# Altium PCB rpi_adapter.PcbDoc (part 3 of 3)
Units mil, origin at the board's own origin, x right, y up, seen from the top; angles counter-clockwise.
Board outline 1339.12 x 1250 mil, 4 copper layers (Top Layer, L02_GND, L03_GND, Bottom Layer), stack 36.268 mil thick; 18 components, 28 nets, 121 pads, 201 vias.
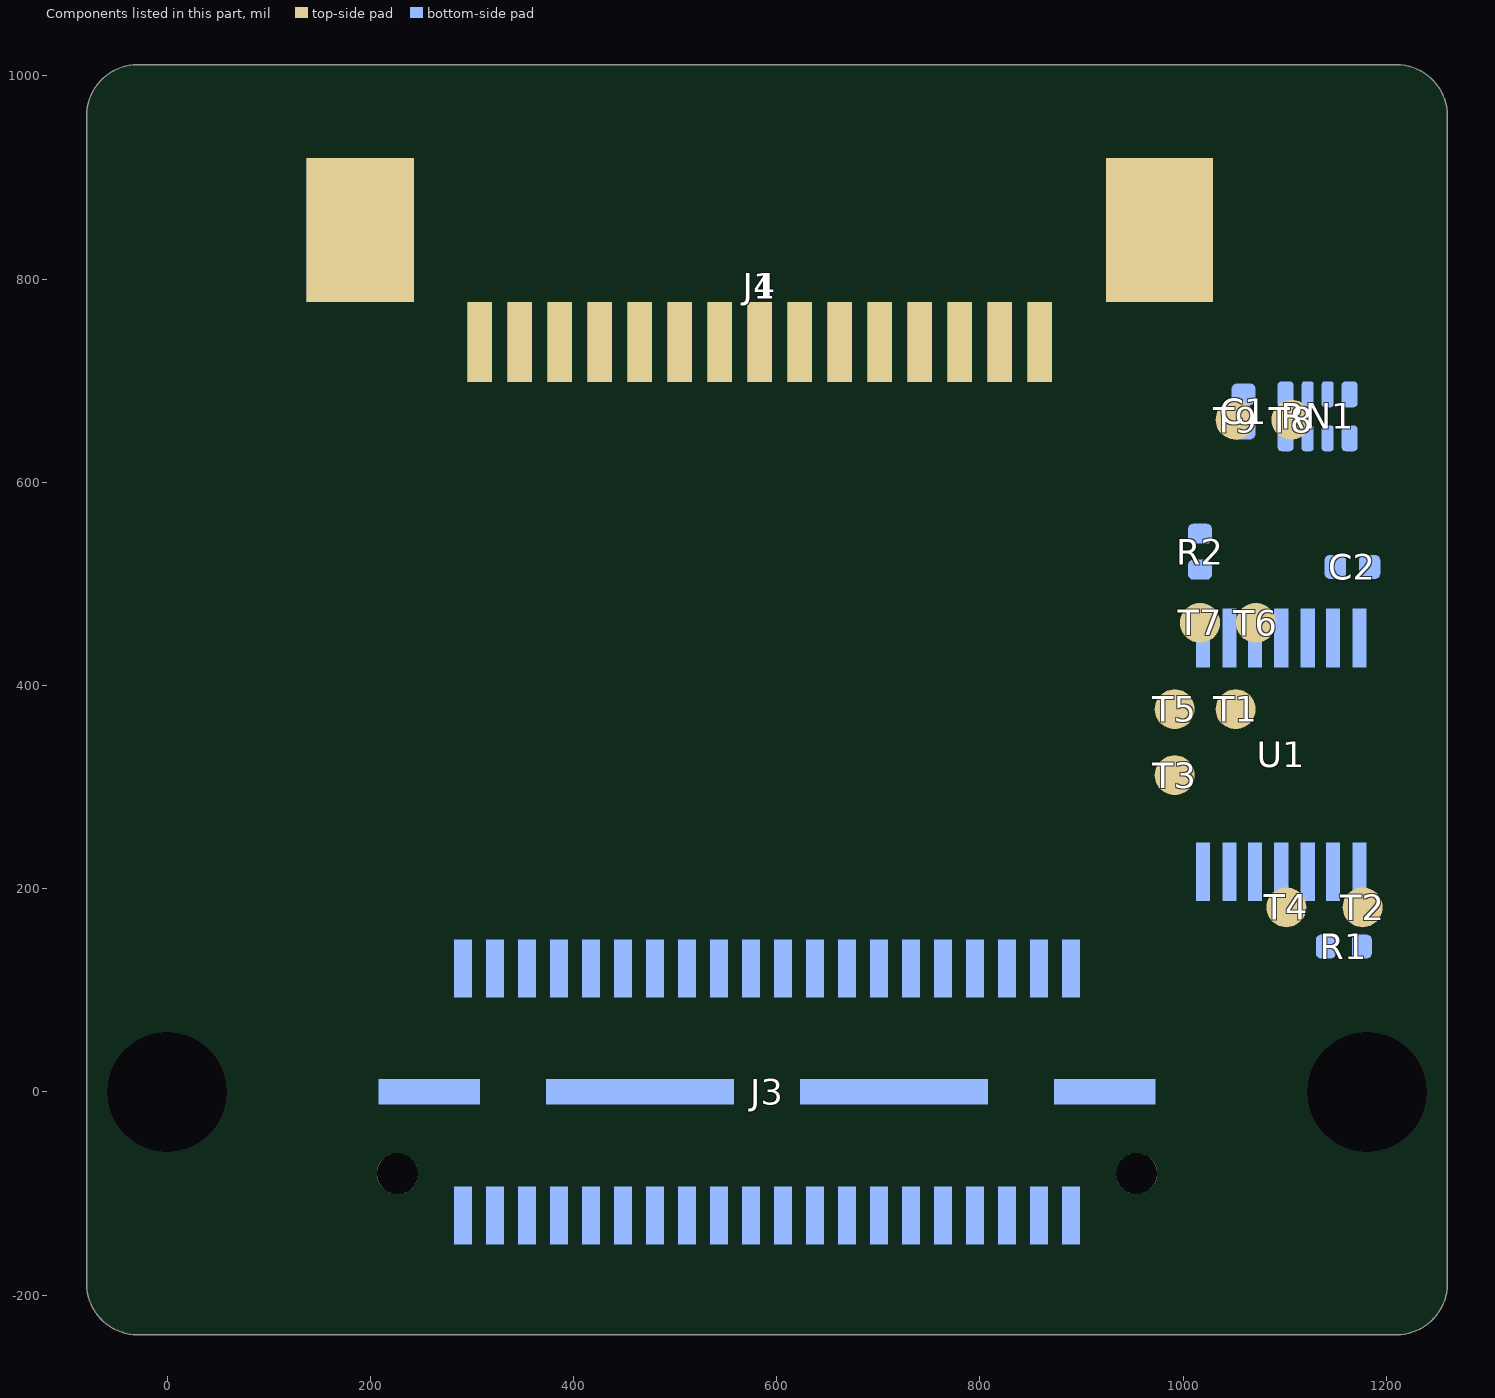
[diagram p4: the components of this part, seen from the top]

## Keep-outs (continued)
L03_GND:
  region: 378.16,389.83 378.16,351.78 378.08,350.03 377.85,348.3 377.47,346.6 376.95,344.94 376.28,343.32 375.48,341.78 374.54,340.31 373.48,338.92 372.3,337.64 371.01,336.46 369.63,335.39 368.16,334.46 366.61,333.65 365,332.98 363.33,332.46 361.63,332.08 359.9,331.85 358.16,331.78 356.41,331.85 354.68,332.08 352.98,332.46 351.32,332.98 349.7,333.65 348.16,334.46 346.68,335.39 345.3,336.46 344.01,337.64 342.84,338.92 341.77,340.31 340.84,341.78 340.03,343.32 339.36,344.94 338.84,346.6 338.46,348.3 338.23,350.03 338.16,351.78 338.16,389.83 338.23,391.57 338.46,393.3 338.84,395.01 339.36,396.67 340.03,398.28 340.84,399.83 341.77,401.3 342.84,402.68 344.01,403.97 345.3,405.15 346.68,406.21 348.16,407.15 349.7,407.96 351.32,408.62 352.98,409.15 354.68,409.53 356.41,409.75 358.16,409.83 359.9,409.75 361.63,409.53 363.33,409.15 365,408.62 366.61,407.96 368.16,407.15 369.63,406.21 371.01,405.15 372.3,403.97 373.48,402.68 374.54,401.3 375.48,399.83 376.28,398.28 376.95,396.67 377.47,395.01 377.85,393.3 378.08,391.57
  region: 516.36,451.17 516.36,413.12 516.28,411.37 516.05,409.64 515.67,407.94 515.15,406.28 514.48,404.66 513.68,403.12 512.74,401.65 511.68,400.26 510.5,398.98 509.21,397.8 507.83,396.73 506.36,395.8 504.81,394.99 503.2,394.32 501.53,393.8 499.83,393.42 498.1,393.19 496.36,393.12 494.61,393.19 492.88,393.42 491.18,393.8 489.52,394.32 487.9,394.99 486.36,395.8 484.88,396.73 483.5,397.8 482.21,398.98 481.04,400.26 479.97,401.65 479.04,403.12 478.23,404.66 477.56,406.28 477.04,407.94 476.66,409.64 476.43,411.37 476.36,413.12 476.36,451.17 476.43,452.91 476.66,454.64 477.04,456.35 477.56,458.01 478.23,459.62 479.04,461.17 479.97,462.64 481.04,464.02 482.21,465.31 483.5,466.49 484.88,467.55 486.36,468.49 487.9,469.3 489.52,469.96 491.18,470.49 492.88,470.87 494.61,471.09 496.36,471.17 498.1,471.09 499.83,470.87 501.53,470.49 503.2,469.96 504.81,469.3 506.36,468.49 507.83,467.55 509.21,466.49 510.5,465.31 511.68,464.02 512.74,462.64 513.68,461.17 514.48,459.62 515.15,458.01 515.67,456.35 516.05,454.64 516.28,452.91
  region: 571.53,-160.11 609.58,-160.11 611.33,-160.19 613.06,-160.42 614.76,-160.8 616.42,-161.32 618.04,-161.99 619.58,-162.79 621.05,-163.73 622.44,-164.79 623.72,-165.97 624.9,-167.26 625.97,-168.64 626.9,-170.11 627.71,-171.66 628.38,-173.27 628.9,-174.94 629.28,-176.64 629.51,-178.37 629.58,-180.11 629.51,-181.86 629.28,-183.59 628.9,-185.29 628.38,-186.95 627.71,-188.57 626.9,-190.11 625.97,-191.59 624.9,-192.97 623.72,-194.26 622.44,-195.43 621.05,-196.5 619.58,-197.43 618.04,-198.24 616.42,-198.91 614.76,-199.43 613.06,-199.81 611.33,-200.04 609.58,-200.11 571.53,-200.11 569.79,-200.04 568.06,-199.81 566.35,-199.43 564.69,-198.91 563.08,-198.24 561.53,-197.43 560.06,-196.5 558.68,-195.43 557.39,-194.26 556.21,-192.97 555.15,-191.59 554.21,-190.11 553.4,-188.57 552.74,-186.95 552.21,-185.29 551.83,-183.59 551.61,-181.86 551.53,-180.11 551.61,-178.37 551.83,-176.64 552.21,-174.94 552.74,-173.27 553.4,-171.66 554.21,-170.11 555.15,-168.64 556.21,-167.26 557.39,-165.97 558.68,-164.79 560.06,-163.73 561.53,-162.79 563.08,-161.99 564.69,-161.32 566.35,-160.8 568.06,-160.42 569.79,-160.19
  region: 382.56,-160.11 420.61,-160.11 422.36,-160.19 424.08,-160.42 425.79,-160.8 427.45,-161.32 429.06,-161.99 430.61,-162.79 432.07,-163.73 433.47,-164.79 434.74,-165.97 435.92,-167.26 436.99,-168.64 437.92,-170.11 438.73,-171.66 439.4,-173.27 439.92,-174.94 440.31,-176.64 440.54,-178.37 440.61,-180.11 440.54,-181.86 440.31,-183.59 439.92,-185.29 439.4,-186.95 438.73,-188.57 437.92,-190.11 436.99,-191.59 435.92,-192.97 434.74,-194.26 433.47,-195.43 432.07,-196.5 430.61,-197.43 429.06,-198.24 427.45,-198.91 425.79,-199.43 424.08,-199.81 422.36,-200.04 420.61,-200.11 382.56,-200.11 380.81,-200.04 379.08,-199.81 377.38,-199.43 375.72,-198.91 374.11,-198.24 372.56,-197.43 371.08,-196.5 369.71,-195.43 368.41,-194.26 367.23,-192.97 366.17,-191.59 365.23,-190.11 364.42,-188.57 363.76,-186.95 363.23,-185.29 362.86,-183.59 362.64,-181.86 362.56,-180.11 362.64,-178.37 362.86,-176.64 363.23,-174.94 363.76,-173.27 364.42,-171.66 365.23,-170.11 366.17,-168.64 367.23,-167.26 368.41,-165.97 369.71,-164.79 371.08,-163.73 372.56,-162.79 374.11,-161.99 375.72,-161.32 377.38,-160.8 379.08,-160.42 380.81,-160.19
  region: 477.04,-160.11 515.09,-160.11 516.84,-160.19 518.56,-160.42 520.27,-160.8 521.93,-161.32 523.54,-161.99 525.09,-162.79 526.55,-163.73 527.95,-164.79 529.22,-165.97 530.4,-167.26 531.47,-168.64 532.4,-170.11 533.21,-171.66 533.88,-173.27 534.4,-174.94 534.79,-176.64 535.02,-178.37 535.09,-180.11 535.02,-181.86 534.79,-183.59 534.4,-185.29 533.88,-186.95 533.21,-188.57 532.4,-190.11 531.47,-191.59 530.4,-192.97 529.22,-194.26 527.95,-195.43 526.55,-196.5 525.09,-197.43 523.54,-198.24 521.93,-198.91 520.27,-199.43 518.56,-199.81 516.84,-200.04 515.09,-200.11 477.04,-200.11 475.29,-200.04 473.56,-199.81 471.86,-199.43 470.2,-198.91 468.59,-198.24 467.04,-197.43 465.56,-196.5 464.19,-195.43 462.89,-194.26 461.71,-192.97 460.65,-191.59 459.71,-190.11 458.9,-188.57 458.24,-186.95 457.71,-185.29 457.34,-183.59 457.12,-181.86 457.04,-180.11 457.12,-178.37 457.34,-176.64 457.71,-174.94 458.24,-173.27 458.9,-171.66 459.71,-170.11 460.65,-168.64 461.71,-167.26 462.89,-165.97 464.19,-164.79 465.56,-163.73 467.04,-162.79 468.59,-161.99 470.2,-161.32 471.86,-160.8 473.56,-160.42 475.29,-160.19
  region: 349.77,619.99 349.77,581.94 349.69,580.19 349.46,578.47 349.08,576.76 348.56,575.1 347.89,573.49 347.09,571.94 346.15,570.48 345.09,569.08 343.91,567.81 342.62,566.63 341.24,565.56 339.77,564.63 338.22,563.82 336.61,563.15 334.94,562.63 333.24,562.24 331.51,562.01 329.77,561.94 328.02,562.01 326.29,562.24 324.59,562.63 322.93,563.15 321.31,563.82 319.77,564.63 318.29,565.56 316.91,566.63 315.62,567.81 314.45,569.08 313.38,570.48 312.45,571.94 311.64,573.49 310.97,575.1 310.45,576.76 310.07,578.47 309.84,580.19 309.77,581.94 309.77,619.99 309.84,621.74 310.07,623.47 310.45,625.17 310.97,626.83 311.64,628.44 312.45,629.99 313.38,631.47 314.45,632.84 315.62,634.14 316.91,635.32 318.29,636.38 319.77,637.32 321.31,638.13 322.93,638.79 324.59,639.32 326.29,639.69 328.02,639.91 329.77,639.99 331.51,639.91 333.24,639.69 334.94,639.32 336.61,638.79 338.22,638.13 339.77,637.32 341.24,636.38 342.62,635.32 343.91,634.14 345.09,632.84 346.15,631.47 347.09,629.99 347.89,628.44 348.56,626.83 349.08,625.17 349.46,623.47 349.69,621.74
  region: 688.65,697.65 714.67,697.65 714.67,778.39 688.65,778.39
  region: 531.17,697.65 557.19,697.65 557.19,778.39 531.17,778.39
  region: 470.26,-151.2 490.36,-151.2 490.36,-92.11 470.26,-92.11
  region: 596.24,92.1 616.34,92.1 616.34,151.19 596.24,151.19
  region: 596.24,-151.2 616.34,-151.2 616.34,-92.11 596.24,-92.11
  region: 564.75,-151.2 584.85,-151.2 584.85,-92.11 564.75,-92.11
  region: 749.11,537.96 787.16,537.96 788.91,537.88 790.64,537.65 792.34,537.27 794,536.75 795.62,536.08 797.16,535.28 798.63,534.34 800.02,533.28 801.3,532.1 802.48,530.81 803.55,529.43 804.48,527.96 805.29,526.41 805.96,524.8 806.48,523.13 806.86,521.43 807.09,519.7 807.16,517.96 807.09,516.21 806.86,514.48 806.48,512.78 805.96,511.12 805.29,509.5 804.48,507.96 803.55,506.48 802.48,505.1 801.3,503.81 800.02,502.64 798.63,501.57 797.16,500.64 795.62,499.83 794,499.16 792.34,498.64 790.64,498.26 788.91,498.03 787.16,497.96 749.11,497.96 747.37,498.03 745.64,498.26 743.93,498.64 742.27,499.16 740.66,499.83 739.11,500.64 737.64,501.57 736.26,502.64 734.97,503.81 733.79,505.1 732.73,506.48 731.79,507.96 730.98,509.5 730.32,511.12 729.79,512.78 729.41,514.48 729.19,516.21 729.11,517.96 729.19,519.7 729.41,521.43 729.79,523.13 730.32,524.8 730.98,526.41 731.79,527.96 732.73,529.43 733.79,530.81 734.97,532.1 736.26,533.28 737.64,534.34 739.11,535.28 740.66,536.08 742.27,536.75 743.93,537.27 745.64,537.65 747.37,537.88
  region: 470.26,92.1 490.36,92.1 490.36,151.19 470.26,151.19
  region: 501.76,-151.2 521.86,-151.2 521.86,-92.11 501.76,-92.11
  region: 501.76,92.1 521.86,92.1 521.86,151.19 501.76,151.19
  region: 781.07,689.18 819.12,689.18 820.87,689.1 822.6,688.87 824.3,688.49 825.96,687.97 827.58,687.3 829.12,686.5 830.59,685.56 831.98,684.5 833.26,683.32 834.44,682.03 835.51,680.65 836.44,679.18 837.25,677.63 837.92,676.02 838.44,674.35 838.82,672.65 839.05,670.92 839.12,669.18 839.05,667.43 838.82,665.7 838.44,664 837.92,662.34 837.25,660.72 836.44,659.18 835.51,657.7 834.44,656.32 833.26,655.03 831.98,653.86 830.59,652.79 829.12,651.86 827.58,651.05 825.96,650.38 824.3,649.86 822.6,649.48 820.87,649.25 819.12,649.18 781.07,649.18 779.33,649.25 777.6,649.48 775.89,649.86 774.23,650.38 772.62,651.05 771.07,651.86 769.6,652.79 768.22,653.86 766.93,655.03 765.75,656.32 764.69,657.7 763.75,659.18 762.94,660.72 762.28,662.34 761.75,664 761.37,665.7 761.15,667.43 761.07,669.18 761.15,670.92 761.37,672.65 761.75,674.35 762.28,676.02 762.94,677.63 763.75,679.18 764.69,680.65 765.75,682.03 766.93,683.32 768.22,684.5 769.6,685.56 771.07,686.5 772.62,687.3 774.23,687.97 775.89,688.49 777.6,688.87 779.33,689.1
  region: 649.28,697.65 675.3,697.65 675.3,778.39 649.28,778.39
  region: 659.24,92.1 679.34,92.1 679.34,151.19 659.24,151.19
  region: 564.75,92.1 584.85,92.1 584.85,151.19 564.75,151.19
  region: 690.73,92.1 710.84,92.1 710.84,151.19 690.73,151.19
  region: 767.39,697.65 793.41,697.65 793.41,778.39 767.39,778.39
  region: 375.76,-151.2 395.88,-151.2 395.88,-92.11 375.76,-92.11
  region: 407.26,-151.2 427.38,-151.2 427.38,-92.11 407.26,-92.11
  region: 570.54,697.65 596.56,697.65 596.56,778.39 570.54,778.39
  region: 737.59,346.6 775.63,346.6 777.38,346.52 779.11,346.29 780.81,345.91 782.47,345.39 784.1,344.72 785.63,343.92 787.11,342.98 788.5,341.92 789.78,340.74 790.95,339.45 792.03,338.07 792.95,336.6 793.77,335.05 794.44,333.44 794.95,331.77 795.34,330.07 795.56,328.34 795.63,326.6 795.56,324.85 795.34,323.12 794.95,321.42 794.44,319.76 793.77,318.14 792.95,316.6 792.03,315.12 790.95,313.74 789.78,312.45 788.5,311.28 787.11,310.21 785.63,309.28 784.1,308.47 782.47,307.8 780.81,307.28 779.11,306.9 777.38,306.67 775.63,306.6 737.59,306.6 735.85,306.67 734.11,306.9 732.41,307.28 730.75,307.8 729.13,308.47 727.59,309.28 726.11,310.21 724.73,311.28 723.45,312.45 722.27,313.74 721.2,315.12 720.27,316.6 719.45,318.14 718.79,319.76 718.27,321.42 717.88,323.12 717.67,324.85 717.59,326.6 717.67,328.34 717.88,330.07 718.27,331.77 718.79,333.44 719.45,335.05 720.27,336.6 721.2,338.07 722.27,339.45 723.45,340.74 724.73,341.92 726.11,342.98 727.59,343.92 729.13,344.72 730.75,345.39 732.41,345.91 734.11,346.29 735.85,346.52
  region: 806.76,697.65 832.78,697.65 832.78,778.39 806.76,778.39
Bottom Layer:
  drawing of 29 lines, arcs and shapes, not listed
Keep-Out Layer:
  lines w39.37: -79.01,-188.99 ccw(c-29.01,-188.99) -29.01,-238.99 786.77,-238.99 1210.11,-238.99 ccw(c1210.11,-188.99) 1260.11,-188.99 1260.11,961.01 ccw(c1210.11,961.01) 1210.11,1011.01 746.77,1011.01 -29.01,1011.01 ccw(c-29.01,961.01) -79.01,961.01 -79.01,-188.99

## Other copper
Top Layer:
  region net P3V3D: 848.28,773.04 848.28,710.17 890.41,668.04 998.68,668.04 1005.81,675.17 1005.81,712.01 999.78,718.04 883.28,718.04 878.28,723.04 868.28,733.04 868.28,773.04
  region net P3V3D: 375.13,988.04 1023.41,988.04 1103.28,988.04 1108.28,983.04 1108.28,933.04 1103.28,928.04 393.28,928.04 298.28,833.04 263.28,833.04 258.28,838.04 258.28,873.04 373.28,988.04
  text "TOP LAYER" at 301.07,-656.98 h100
L02_GND:
  text "LAYER2(PWR)" at 264.02,-657.84 h100
L03_GND:
  text "LAYER3(GND PLANE)" at 101.22,-657.84 h100
Bottom Layer:
  region net P3V3D: 374.28,988.04 1206.09,988.04 1236.77,957.36 1236.77,133.04 1231.77,128.04 1206.77,128.04 1201.77,133.04 1201.77,684.55 1178.28,708.04 1043.28,708.04 1026.77,691.53 1026.77,671.68 1023.13,668.04 1003.28,668.04 983.28,668.04 978.28,673.04 978.28,713.04 1016.66,751.42 1043.66,751.42 1075.28,783.04 1075.28,936.04 1066.28,945.04 473.13,945.04 318.28,790.19 318.28,698.04 298.28,698.04 186.77,586.53 185.52,586.53 185.52,-105.08 190.52,-110.08 245.52,-110.08 265.52,-90.08 300.52,-90.08 300.52,-160.08 285.52,-175.08 160.52,-175.08 125.52,-140.08 125.52,641.68 258.21,774.37 258.21,871.97
  text "BOTTOM LAYER" at 213.93,-657.42 h100

## Silkscreen, mask and mechanical layers (free items; w line width, h text height)
Top Overlay:
  text "3.3V" at 1122.77,937.51 h60
  text "D3" at 852.06,628.22 h60
  text "D0" at 234.14,582.61 h60
  text "SDA0" at 932.91,578.81 h60
  text "SCL0" at 1092.89,578.81 h60
  text "D4" at 817.02,527.97 h60
  text "SDA1" at 932.4,507.89 h60
  text "SCL1" at 1095.69,507.88 h60
  text "D1" at 408.29,417.15 h60
  text "D2" at 266.24,355.81 h60
  text "D5" at 801.77,307.27 h60
  text "EN1" at 909.58,231.81 h60
  text "EN0" at 1141.84,101.79 h60
  text "tinyDualRPi adapter Rev2" at 379.13,-32.66 h60
  text "TOP SILKSCREEN" at 190.93,-922.18 h100
Bottom Overlay:
  text "BOTTOM SILKSCREEN" at 1049.54,-921.4 h100
Top Paste:
  text "TOP PASTEMASK" at 181.99,-752.58 h100
Bottom Paste:
  text "BOTTOM PASTEMASK" at 99.19,-752.11 h100
Top Solder:
  drawing of 17 lines, arcs and shapes, not listed
  text "TOP SOLDERMASK" at 153.46,-835.72 h100
Bottom Solder:
  text "BOTTOM SOLDERMASK" at 55.74,-835.2 h100
Drill Guide:
  the board outline again, w10
Board Shape:
  lines w0: -79.01,-188.99 ccw(c-29.01,-188.99) -29.01,-238.99 786.77,-238.99 1210.11,-238.99 ccw(c1210.11,-188.99) 1260.11,-188.99 1260.11,961.01 ccw(c1210.11,961.01) 1210.11,1011.01 746.77,1011.01 -29.01,1011.01 ccw(c-29.01,961.01) -79.01,961.01 -79.01,-188.99
  text "BOARD OUTLINE" at 193.26,-556.96 h100
Assembly TOP/BOTTOM Top:
  text "TOP ASSEMBLY" at 241.37,-1004.33 h100
Assembly TOP/BOTTOM Bottom:
  text "BOTTOM ASSEMBLY" at 1008.56,-1007.16 h100
Drill Drawing:
  drawing of 233 lines, arcs and shapes, not listed
  text "Layer" at 1748.84,2437.69 h86.73
  text "Name" at 2111.96,2437.69 h86.73
  text "Material" at 2814.35,2437.69 h86.73
  text "Thickness" at 3252.87,2437.69 h86.73
  text "Constant" at 3771.29,2437.69 h86.73
  text "Board Layer Stack" at 4251.09,2437.69 h86.73
  text "Top Overlay" at 2111.96,2264.24 h86.73
  text "Top Solder" at 2111.96,2090.79 h86.73
  text "SM-001" at 2819.81,2090.79 h86.73
  text "0.025mm" at 3267.53,2090.79 h86.73
  text "4" at 3905.19,2090.79 h86.73
  text "1" at 1748.84,1917.33 h86.73
  text "Top Layer" at 2111.96,1917.33 h86.73
  text "CF-004" at 2821.22,1917.33 h86.73
  text "0.035mm" at 3267.53,1917.33 h86.73
  text "Dielectric 1" at 2111.96,1743.88 h86.73
  text "7628*1" at 2832.78,1743.88 h86.73
  text "0.210mm" at 3267.53,1743.88 h86.73
  text "4.05" at 3850.87,1743.88 h86.73
  text "2" at 1748.76,1570.43 h86.73
  text "L02_GND" at 2111.96,1570.43 h86.73
  text "CF-004" at 2821.22,1570.43 h86.73
  text "0.015mm" at 3267.53,1570.43 h86.73
  text "Dielectric 2" at 2111.96,1396.97 h86.73
  text "Core" at 2866.26,1396.97 h86.73
  text "0.400mm" at 3267.53,1396.97 h86.73
  text "4.05" at 3850.87,1396.97 h86.73
  text "3" at 1748.84,1223.52 h86.73
  text "L03_GND" at 2111.96,1223.52 h86.73
  text "CF-004" at 2821.22,1223.52 h86.73
  text "0.015mm" at 3267.53,1223.52 h86.73
  text "Dielectric 3" at 2111.96,1050.07 h86.73
  text "7628*1" at 2832.78,1050.07 h86.73
  text "0.210mm" at 3267.53,1050.07 h86.73
  text "4.05" at 3850.87,1050.07 h86.73
  text "4" at 1748.84,876.62 h86.73
  text "Bottom Layer" at 2111.96,876.62 h86.73
  text "CF-004" at 2821.22,876.62 h86.73
  text "0.035mm" at 3267.53,876.62 h86.73
  text "Bottom Solder" at 2111.96,703.16 h86.73
  text "SM-001" at 2819.81,703.16 h86.73
  text "0.025mm" at 3267.53,703.16 h86.73
  text "4" at 3905.19,703.16 h86.73
  text "Bottom Overlay" at 2111.96,529.71 h86.73
  text "Total board thickness:" at 1748.84,356.26 h86.73
  text "0.970mm" at 3267.53,356.26 h86.73
  text "IMPEDANCE" at 2765.92,80.66 h80
  text "WIDTH" at 3884.92,-26.34 h80
  text "SPACE" at 4512.92,-26.34 h80
  text "LAYER" at 1832.92,-55.34 h80
  text "SINGLE END" at 2387.92,-140.34 h80
  text "DIFF" at 3237.88,-144.7 h80
  text "----" at 2447.62,-372.18 h50
  text "100 OHM" at 3150.89,-378.46 h50
  text "7.55 MILS" at 3812.23,-380.6 h100
  text "7.0 MILS" at 4435.93,-386.75 h100
  text "L1 & L4" at 1805.92,-394.34 h80
  text "Symbol" at 1740.93,-825.74 h73.59
  text "Count" at 2029.11,-825.74 h73.59
  text "Hole Size" at 2328.52,-825.74 h73.59
  text "Plated" at 2914.99,-825.74 h73.59
  text "Hole Type" at 3167.97,-825.74 h73.59
  text "Drill Layer Pair" at 3536.3,-825.74 h73.59
  text "Via/Pad" at 4233.86,-825.74 h73.59
  text "Pad Shape" at 4535.66,-825.74 h73.59
  text "2" at 2029.11,-952.61 h61.33
  text "40.16mil (1.020mm)" at 2328.52,-952.61 h61.33
  text "NPTH" at 2914.99,-952.61 h61.33
  text "Round" at 3167.97,-952.61 h61.33
  text "Top Layer - Bottom Layer" at 3536.3,-952.61 h61.33
  text "Pad" at 4233.86,-952.61 h61.33
  text "Rounded" at 4535.66,-952.61 h61.33
  text "B" at 1715.26,-962.6 h56.38
  text "2" at 2029.11,-1079.47 h61.33
  text "118.11mil (3.000mm)" at 2328.52,-1079.47 h61.33
  text "NPTH" at 2914.99,-1079.47 h61.33
  text "Round" at 3167.97,-1079.47 h61.33
  text "Top Layer - Bottom Layer" at 3536.3,-1079.47 h61.33
  text "Pad" at 4233.86,-1079.47 h61.33
  text "Rounded" at 4535.66,-1079.47 h61.33
  text "C" at 1715.26,-1089.46 h56.38
  text "201" at 2029.11,-1206.34 h61.33
  text "8.00mil (0.203mm)" at 2328.52,-1206.34 h61.33
  text "PTH" at 2914.99,-1206.34 h61.33
  text "Round" at 3167.97,-1206.34 h61.33
  text "Top Layer - Bottom Layer" at 3536.3,-1206.34 h61.33
  text "Via" at 4233.86,-1206.34 h61.33
  text "Rounded" at 4535.66,-1206.34 h61.33
  text "A" at 1715.26,-1216.33 h56.38
  text "205 Total" at 2029.11,-1333.2 h61.33

## Dimensions
1210.11,-188.99 to 1394.29,-373.17 on Drill Drawing
-29.01,1011.01 to -29.01,-238.99 on Drill Drawing
-79.01,961.01 to 1260.11,961.01 on Drill Drawing

## Text inside footprints (layer, text, board x,y; h text height)
J3: Bottom Overlay "40" at 970.45,144.73 h60; Bottom Overlay "39" at 968.02,-193 h60; Bottom Overlay "2" at 261.77,149.68 h60; Assembly TOP/BOTTOM Bottom "39" at 996.77,-174.65 h60; Assembly TOP/BOTTOM Bottom "2" at 251.83,139.68 h60; Assembly TOP/BOTTOM Bottom "40" at 1006.77,140.35 h60